# Altium PCB main.PcbDoc
Units mil, origin at the board's own origin, x right, y up, seen from the top; angles counter-clockwise.
Board outline 6000 x 4000 mil, 2 copper layers (Top Layer, Bottom Layer); 62 components, 37 nets, 135 pads, 0 vias.
Unrouted connection lines stored in the file: 98.
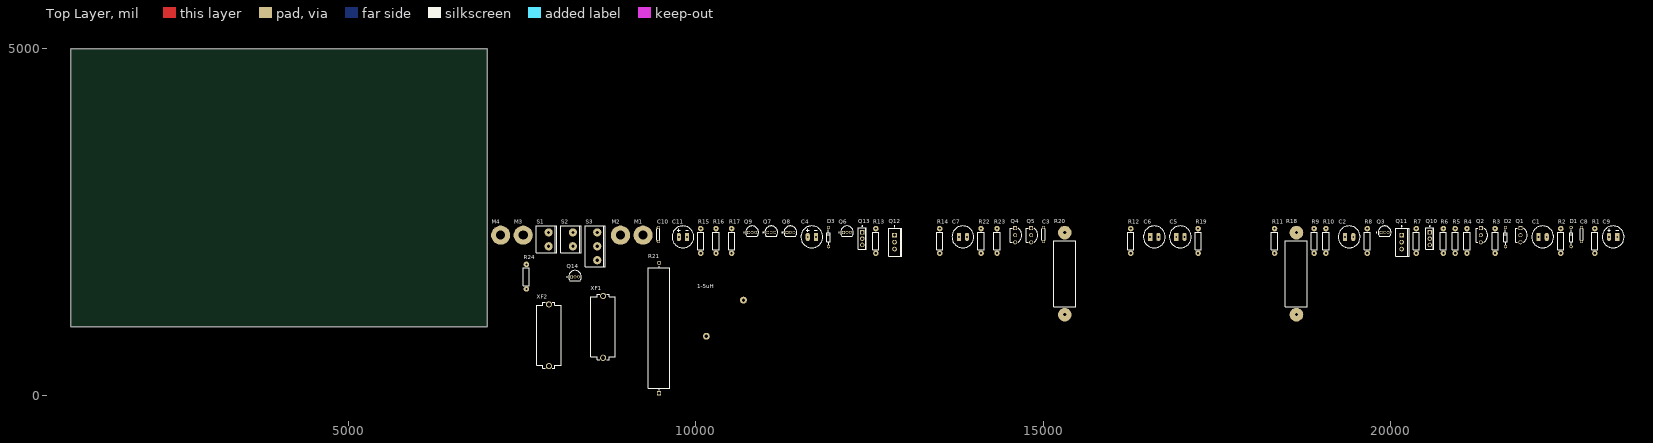
[diagram p0: Top Layer view]
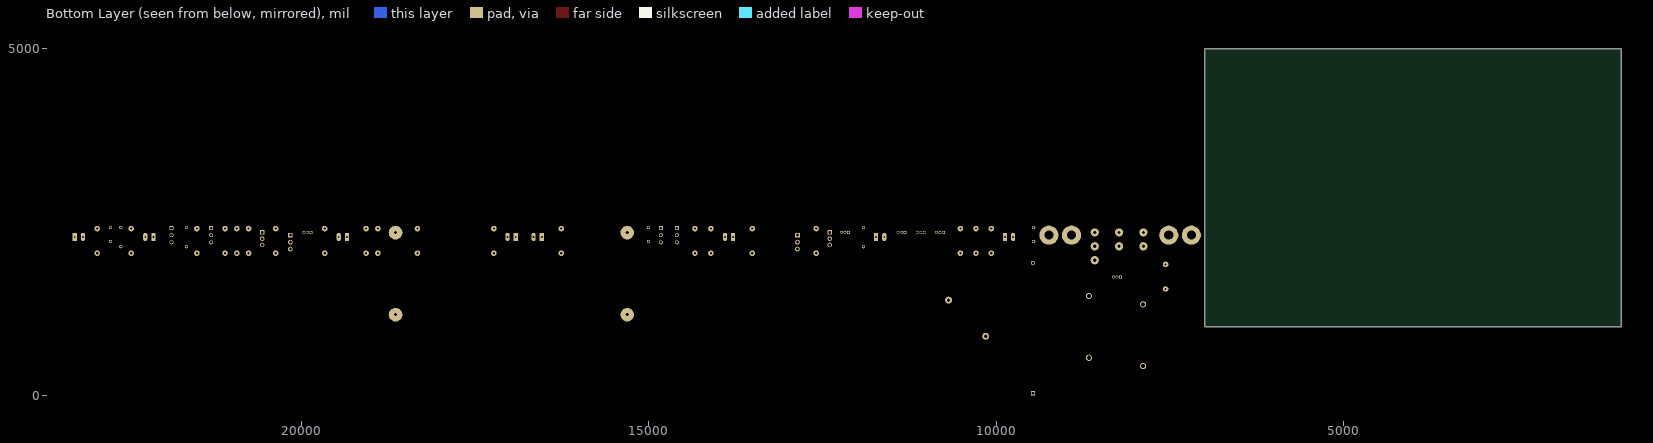
[diagram p1: Bottom Layer view, seen from below]

## Layer stack, top to bottom
Top Solder: solder mask 0.4, Solder Resist, Dk 3.5
Top Layer: signal copper 1.4
Dielectric 1: dielectric 12.6, FR-4, Dk 4.8
Bottom Layer: signal copper 1.4
Bottom Solder: solder mask 0.4, Solder Resist, Dk 3.5

## Board outline
1000,1000 7000,1000 7000,5000 1000,5000

## Design rules (kind name [scope] priority, off if disabled: settings)
Clearance [All] p1: gap=10 ignorepadtopadclearanceinfootprint=FALSE
PolygonConnect [All] p1: connectstyle=Relief reliefconductorwidth=10 reliefentries=4 polygonreliefangle="90 Angle" airgapwidth=10
RoutingVias [All] p1: holewidth=28 width=50 viastyle="Through Hole" minholewidth=28 minwidth=50 maxholewidth=28 maxwidth=50
SolderMaskExpansion [All] p1: expansion=4 istentingtop=FALSE
Width [All] p1: maxlimit=10 minlimit=10 preferedwidth=10
30 further rules are at their usual default settings.

## Components (designator, comment, footprint, x,y, rotation, side; value= is the part's Value field where it differs from the comment)
1-5uH "homemade inductor" "homecooked inductor" 10420,1120 r0 top
C1 "Cap" "Cap Ø8" 22130,2290 r0 top value=47uF
C2 "Cap" "Cap Ø8" 19345,2290 r0 top value=47u
C3 "Cap" Cap-1 15005,2225 r90 top value=100p
C4 "Cap" "Cap Lyt Ø8" 11610,2290 r0 top value=220u
C5 "Cap" "Cap Ø8" 16915,2290 r0 top value=1u
C6 "Cap" "Cap Ø8" 16540,2290 r0 top value=10u
C7 "Cap" "Cap Ø8" 13785,2290 r0 top value=100n
C8 "Cap" Cap-1 22750,2225 r90 top value=100n
C9 "Cap" "Cap Lyt Ø8" 23145,2290 r0 top value=220u
C10 "Cap" Cap-1 9460,2225 r90 top value=100n
C11 "Cap" "Cap Lyt Ø8" 9755,2290 r0 top value=220u
D1 "Diode DO-35" "Diode 2 space" 22600,2150 r90 top
D2 "Diode DO-35" "Diode 2 space" 21655,2150 r90 top
D3 "Diode DO-35" "Diode 2 space" 11910,2150 r90 top
M1 "Screw Hole" "M3 Hole" 9240,2315 r0 top
M2 "Screw Hole" "M3 Hole" 8915,2315 r0 top
M3 "Screw Hole" "M3 Hole" 7515,2315 r0 top
M4 "Screw Hole" "M3 Hole" 7190,2315 r0 top
Q1 "BC557BTF" FP-135AR-MFG 21885,2315 r0 top
Q2 "BC557BTF" FP-135AR-MFG 21315,2315 r0 top
Q3 "BC547B" ONSC-TO-92-3-29-11 19915,2355 r0 top
Q4 "BC557BTF" FP-135AR-MFG 14610,2315 r0 top
Q5 "BC557BTF" FP-135AR-MFG 14840,2315 r0 top
Q6 "BC547B" ONSC-TO-92-3-29-11 12175,2355 r0 top
Q7 "BC547B" ONSC-TO-92-3-29-11 11085,2355 r0 top
Q8 "BC547B" ONSC-TO-92-3-29-11 11360,2355 r0 top
Q9 "BC547B" ONSC-TO-92-3-29-11 10810,2355 r0 top
Q10 "MJE340" ONSC-TO-225-3-77-09 20565,2265 r0 top
Q11 "TIP41C" ONSC-TO-220-3-221A-09 20160,2215 r0 top
Q12 "TIP42C" ONSC-TO-220-3-221A-09 12860,2215 r0 top
Q13 "MJE350" ONSC-TO-225-3-77-09 12395,2265 r0 top
Q14 "BC547B" ONSC-TO-92-3-29-11 8260,1715 r0 top
R1 "Resistor" "RES THT 9mm" 22940,2055 r90 top value=100
R2 "Resistor" "RES THT 9mm" 22450,2055 r90 top value=150
R3 "Resistor" "RES THT 9mm" 21505,2055 r90 top value=2k2
R4 "Resistor" "RES THT 9mm" 21100,2055 r90 top value=16
R5 "Resistor" "RES THT 9mm" 20930,2055 r90 top value=10k
R6 "Resistor" "RES THT 9mm" 20760,2055 r90 top value=100
R7 "Resistor" "RES THT 9mm" 20370,2055 r90 top value=1k
R8 "Resistor" "RES THT 9mm" 19665,2055 r90 top value=10k
R9 "Resistor" "RES THT 9mm" 18900,2055 r90 top value=100
R10 "Resistor" "RES THT 9mm" 19070,2055 r90 top value=100
R11 "Resistor" "RES THT 9mm" 18330,2055 r90 top value=280
R12 "Resistor" "RES THT 9mm" 16260,2055 r90 top value=10K
R13 "Resistor" "RES THT 9mm" 12590,2055 r90 top value=100
R14 "Resistor" "RES THT 9mm" 13510,2055 r90 top value=500
R15 "Resistor" "RES THT 9mm" 10070,2055 r90 top value=68
R16 "Resistor" "RES THT 9mm" 10290,2055 r90 top value=68
R17 "Resistor" "RES THT 9mm" 10515,2055 r90 top value=68
R18 "Resistor" "RES THT 30mm" 18645,1170 r90 top value=0.4
R19 "Resistor" "RES THT 9mm" 17230,2055 r90 top value=220
R20 "Resistor" "RES THT 30mm" 15310,1170 r90 top value=0.4
R21 "AC10000004708JAB00" FP-AC10-MFG 9470,976.57 r90 top
R22 "Resistor" "RES THT 9mm" 14105,2055 r90 top value=22.6k
R23 "Resistor" "RES THT 9mm" 14335,2055 r90 top value=10
R24 "Resistor" "RES THT 9mm" 7560,1540 r90 top value=18.7k
S1 "Screw 2" Screw-2 7880,2155 r90 top
S2 "Screw 2" Screw-2 8230,2155 r90 top
S3 "Screw 3" Screw-3 8580,1955 r90 top
XF1 "696101000002" 696101000002 -41335,50994.88 r90 top
XF2 "696101000002" 696101000002 -42115,50874.88 r90 top

## Footprints (in the part's own frame and the unit in brackets; to place one, negate y for a bottom-side part, rotate by r counter-clockwise, add the part's x,y. Pads: shape width x height; smd on the part's side, far side on the other; paste and mask are expansions set on the pad)
696101000002 [mm] "FUSEHOLDER BLOCKS - PCB - CLIP COVER - THT"
  round 2.25 hole 1.5: 1(-1281.3,-1270) 2(-1258.7,-1270)
  silkscreen extent -1282,-1274.5 -1258,-1265.5, body extent -1282,-1274.5 -1258,-1265.5, height 13.55
"Cap Lyt Ø8" [mm] "Capacitor"
  oval 1.5x3 hole 0.7: 1(0,0)
  rect 1.5x3 hole 0.7: 2(3,0)
  silkscreen extent -2.5,-4 5.5,4
"Cap Ø8" [mm] "Capacitor"
  rect 1.5x3 hole 0.7: 1(0,0)
  oval 1.5x3 hole 0.7: 2(3,0)
  silkscreen extent -2.5,-4 5.5,4
Cap-1 [mm] "Capacitor with 1 space"
  round 1.2 hole 0.7: 1(0,0) 2(5.08,0)
  silkscreen extent 0.45,-0.58 4.62,0.58
"Diode 2 space" [mm] "Diode 2 emty spaces"
  round 1.2 hole 0.7: 1(0,0) 2(7,0)
  silkscreen extent 0.77,-0.6 6.22,0.6, body extent -0.23,-0.77 7.22,0.75, height 1.51
FP-135AR-MFG [mm]
  rect 1.45x1.45 hole 0.95 paste-2539.97 mask+0: 1(-0.38,2.6)
  round 1.45 hole 0.95 paste-2539.97 mask+0: 2(-0.38,0) 3(-0.38,-2.6)
  silkscreen extent -2.09,-2.6 2.09,2.6, body extent -2.19,-3.42 2.19,3.42, height 0.25
FP-AC10-MFG [mm]
  rect 1.55x1.55 hole 1 paste-2539.97 mask+0: 1(-23.83,0)
  round 1.55 hole 1 paste-2539.97 mask+0: 2(23.83,0)
  silkscreen extent -22.65,-4 22.65,4, body extent -24.71,-4.1 24.71,4.1, height 0.25
"homecooked inductor" [mil]
  round 100 hole 47.24: 1(265,260) 2(-270,-260)
  body extent -409,-465 418,401, height 625
"M3 Hole" [mm]
  round 7 hole 3.3 mask+0: 1(0,0)
ONSC-TO-92-3-29-11 [mm] "TO, 3-Leads, Body Dia 4.7mm, Pitch 1.27mm"
  rect 1.05x1.05 hole 0.8: 1(-1.27,0)
  round 1.05 hole 0.8: 2(0,0) 3(1.27,0)
  silkscreen extent -3.07,-1.34 2.35,2.35, body extent -2.35,-1.33 2.36,2.36, height 7.87
ONSC-TO-220-3-221A-09 [mm] "FM, 3-Leads, Body 10.3x4.85mm, Pitch 2.54mm"
  rect 1.7x1.7 hole 1.1: 1(0,2.54)
  round 1.7 hole 1.1: 2(0,0) 3(0,-2.54)
  silkscreen extent -2.2,-5.15 2.7,5.92, body extent -2.18,-5.15 2.67,5.15, height 19.85
ONSC-TO-225-3-77-09 [mm] "FM, 3-Leads, Body 7.8x3mm, Pitch 2.29mm"
  rect 1.6x1.6 hole 1: 1(0,2.29)
  round 1.6 hole 1: 2(0,0) 3(0,-2.29)
  silkscreen extent -1.49,-3.9 1.51,4.67, body extent -1.49,-3.9 1.51,3.9, height 13.64
"RES THT 9mm" [mm]
  round 2 hole 0.8: 1(0,0) 2(9,0)
  silkscreen extent 1.28,-1.12 7.73,1.12, body extent -0.32,-1.13 9.28,1.14, height 2.36
"RES THT 30mm" [mm] "Typically power resistor"
  round 5 hole 1.1: 1(0,0) 2(30,0)
  silkscreen extent 3,-4 27,4
Screw-2 [mm] "Screw Terminal with 2 connections"
  round 3 hole 1.2: 1(0,0) 2(5.075,0)
  silkscreen extent -2.37,-3.03 7.45,4.43, body extent -3.07,-3.1 7.53,4.5, height 10
Screw-3 [mm] "Screw Terminal with 3 connections"
  round 3 hole 1.2: 1(0,0) 2(5.075,0) 3(10.15,0)
  silkscreen extent -2.37,-3.03 12.52,4.43, body extent -2.95,-3.8 12.55,4, height 10.3

## Part data
C1 C2 C5 C6 C7: library part "Capacitor unpolarized"
C3 C8 C10: library part "Capacitor 1 space"
C4 C9 C11: library part "Capacitor electrolytic"
Q1 Q2 Q4 Q5: library part CMP-00278-84408945-1, "BC557BTF Small Signal Bipolar Transistor, 0.1A I(C), 45V V(BR)CEO, 1-Element, PNP, Silicon, TO-92", Case/Package=TO-92, Collector Base Voltage (VCBO)=-50V, Collector Emitter Breakdown Voltage=45V, Collector Emitter Saturation Voltage=-250mV, Current Rating=-100mA, Emitter Base Voltage (VEBO)=-5V, Frequency=150MHz, Manufacturer Lifecycle Status=ACTIVE, Max Collector Current=100mA, Max Frequency=10MHz, Max Operating Temperature=150°C, Max Power Dissipation=500mW, Min Operating Temperature=-65°C, Voltage Rating (DC)=-45V, Collector Emitter Voltage (VCEO)=45V, Contact Plating=Tin, Element Configuration=Single, Gain Bandwidth Product=150MHz, Height=5.33mm, hFE Min=110, Lead Free="Lead Free", Length=5.2mm, Lifecycle Status=Production, Max Breakdown Voltage=45V, Mount="Through Hole", NexarPartId=84408945, Number of Elements=1, Number of Pins=3, Polarity=PNP, Power Dissipation=500mW, REACH SVHC="No SVHC", RoHS=Compliant, Schedule B="8541210080, 8541210080", Transition Frequency=150MHz, Weight=240mg, Width=4.19mm
Q3 Q6 Q7 Q8 Q9 Q14: library part CMP-1048-01467-1, "Amplifier Transistor, NPN Silicon, 3-Pin TO-92, Bulk Box", Manufacturer="On Semiconductor", ComponentLink1Description="Manufacturer URL", ComponentLink1URL=http://www.onsemi.com/, ComponentLink2Description=Datasheet, ComponentLink2URL=http://www.onsemi.com/pub_link/Collateral/BC546-D.PDF, ComponentLink3Description="Package Specification", ComponentLink3URL=http://www.onsemi.cn/pub_link/Collateral/2N6426-D.PDF, DatasheetVersion="Rev. 7", fT Min (MHz)=150, IC Continuous (A)=0.1, Mounting Technology="Through Hole", PackageDescription="3-Pin Transistor Outline, Body 4.825 x 3.685 mm, Pitch 1.27 mm", PackageReference=TO-92-3-29-11_AM_SL, PackageVersion="Rev. AM", Packing="Bulk Box", PartNumber=BC547B, Polarity=NPN, RoHS=FALSE
Q10: library part CMP-1048-01251-1, "Plastic Medium-Power NPN Silicon Transistor, 3-Pin TO-225, Bulk Box", Manufacturer="On Semiconductor", ComponentLink1Description="Manufacturer URL", ComponentLink1URL=http://www.onsemi.com/, ComponentLink2Description=Datasheet, ComponentLink2URL=http://www.onsemi.com/pub_link/Collateral/MJE340-D.PDF, ComponentLink3Description="Package Specification", ComponentLink3URL=http://www.onsemi.com/pub_link/Collateral/77-09.PDF, DatasheetVersion="Rev. 12", IC Continuous (A)=0.5, Mounting Technology="Through Hole", Note1=0, PackageDescription="3-Pin Flange Mount, Vertical Straight Lead, Body 7.6 x 2.7 mm, Pitch 2.29 mm", PackageReference=TO-225-3-77-09, PackageVersion="Rev. AC, 12/2013", Packing="Bulk Box", PartNumber=MJE340, Polarity=NPN, RoHS=FALSE
Q11: library part CMP-1048-01171-1, "Complementary Silicon Plastic Power Transistor, 3-Pin TO-220, Tube", Manufacturer="On Semiconductor", ComponentLink1Description="Manufacturer URL", ComponentLink1URL=http://www.onsemi.com/, ComponentLink2Description=Datasheet, ComponentLink2URL=http://www.onsemi.com/pub_link/Collateral/TIP41A-D.PDF, ComponentLink3Description="Package Specification", ComponentLink3URL=http://www.onsemi.com/pub_link/Collateral/221A-09.PDF, DatasheetVersion="Rev. 10", fT Min (MHz)=3, IC Continuous (A)=6, Mounting Technology="Through Hole", PackageDescription="3-Pin Flange Mount, Vertical Straight Lead, Body 9.97 x 4.445 mm, Pitch 2.54 mm", PackageReference=TO-220-3-221A-09, PackageVersion="Rev. AG, 09/2011", Packing=Tube, PartNumber=TIP41C, Polarity=NPN, RoHS=FALSE
Q12: library part CMP-1048-01107-1, "Complementary Silicon Plastic Power Transistor, 3-Pin TO-220, Tube", Manufacturer="On Semiconductor", ComponentLink1Description="Manufacturer URL", ComponentLink1URL=http://www.onsemi.com/, ComponentLink2Description=Datasheet, ComponentLink2URL=http://www.onsemi.com/pub_link/Collateral/TIP41A-D.PDF, ComponentLink3Description="Package Specification", ComponentLink3URL=http://www.onsemi.com/pub_link/Collateral/221A-09.PDF, DatasheetVersion="Rev. 10", fT Min (MHz)=3, IC Continuous (A)=6, Mounting Technology="Through Hole", PackageDescription="3-Pin Flange Mount, Vertical Straight Lead, Body 9.97 x 4.445 mm, Pitch 2.54 mm", PackageReference=TO-220-3-221A-09, PackageVersion="Rev. AG, 09/2011", Packing=Tube, PartNumber=TIP42C, Polarity=PNP, RoHS=FALSE
Q13: library part CMP-1048-01257-1, "Plastic Medium-Power PNP Silicon Transistor, 3-Pin TO-225, Bulk Box", Manufacturer="On Semiconductor", ComponentLink1Description="Manufacturer URL", ComponentLink1URL=http://www.onsemi.com/, ComponentLink2Description=Datasheet, ComponentLink2URL=http://www.onsemi.com/pub_link/Collateral/MJE350-D.PDF, ComponentLink3Description="Package Specification", ComponentLink3URL=http://www.onsemi.com/pub_link/Collateral/77-09.PDF, DatasheetVersion="Rev. 16", IC Continuous (A)=0.5, Mounting Technology="Through Hole", Note1=0, PackageDescription="3-Pin Flange Mount, Vertical Straight Lead, Body 7.6 x 2.7 mm, Pitch 2.29 mm", PackageReference=TO-225-3-77-09, PackageVersion="Rev. AC, 12/2013", Packing="Bulk Box", PartNumber=MJE350, Polarity=PNP, RoHS=FALSE
R21: library part CMP-00030-44829031-1, "AC10000004708JAB00 Resistor, 4.7 Ohm, ± 5%, 10 W, Axial Leaded, Wirewound, General Purpose", Case/Package=Axial, Max Operating Temperature=200°C, Max Power Dissipation=10W, Min Operating Temperature=-40°C, Resistance=4.7Ω, Temperature Coefficient=-80ppm/°C, Tolerance=5%, Composition=Wirewound, Contact Plating=Tin, Diameter=8mm, Features="Flame Retardant Coating", Length=44mm, Military Standard=Not, Mount="Through Hole", NexarPartId=44829031, Number of Terminations=2, Packaging="Tape & Box (TB)", Power Rating=10W, Radiation Hardening=No, RoHS=Compliant, Termination=Axial, Thickness=8mm, Width=8mm
XF1 XF2: library part CMP-1502-00233-3, Fuse Current=10A, Max Operating Temperature=120°C, Min Operating Temperature=-30°C, Voltage Rating (AC)=250V, Height=13.6mm, Mount="Through Hole", NexarPartId=56808803, Packaging=Box, REACH SVHC=Unknown, RoHS=Non-Compliant
D1 D2 D3: Model=1N4148

## Nets (pads, with @x,y where several pads share a name; then routed paths per layer and width w, separated by ;. In a path a pad name is that pad's centre, name@x,y a point inside that pad or via, vN(x,y) a via of type N, cw(c..) or ccw(c..) an arc to the next point about the centre after c; other vN are vias at no path point)
+37V: C1.2 C8.2 C9.1 D1.1 Q10.2 Q11.2 Q14.1 R1.2 R2.2 XF1.2
-37V: C10.2 C11.1 Q9.3 Q12.2 Q13.2 R15.1 R16.1 R17.1 R24.2 XF2.2
GND: C4.2 C7.1 C8.1 C9.2 C10.1 C11.2 D3.1 M1.1 M2.1 M3.1 M4.1 Q6.1 R8.2 R22.2 S1.2 S2.2 S3.2
Input: Q14.2 S1.1
InVAS: C3.1 Q4.1 Q6.2 Q7.1
NetC1_1: C1.1 R5.2 R8.1
NetC2_1: C2.1 C3.2 Q3.3 Q9.1 R11.1 R13.2
NetC2_2: C2.2 Q1.1 R4.2 R7.2
NetC4_1: C4.1 D3.2 R14.1
NetC5_1: C5.1 Q12.1 Q13.1 R19.1
NetC5_2: C5.2 Q10.1 Q11.1 R19.2
NetC6_1: C6.1 Q4.2 R22.1
NetC6_2: C6.2 Q14.3 R24.1
NetC7_2: C7.2 R21.1
NetD1_2: D1.2 D2.1
NetD2_2: D2.2 Q1.2 R3.1 R5.1
NetQ1_3: Q1.3 R1.1
NetQ2_1: Q2.1 R9.2 R10.2
NetQ2_2: Q2.2 R3.2
NetQ2_3: Q2.3 R2.1
NetQ3_1: Q3.1 R4.1 R6.2
NetQ3_2: Q3.2 R7.1 R11.2
NetQ4_3: Q4.3 R9.1
NetQ5_1: Q5.1 Q7.2 Q8.1 Q8.2
NetQ5_2: Q5.2 R12.2 R14.2
NetQ5_3: Q5.3 R10.1
NetQ6_3: Q6.3 Q9.2 R17.2
NetQ7_3: Q7.3 R15.2
NetQ8_3: Q8.3 R16.2
NetQ10_3: Q10.3 R6.1
NetQ11_3: Q11.3 R18.2
NetQ12_3: Q12.3 R20.1
NetQ13_3: Q13.3 R13.1
NetS3_1: S3.1 XF1.1
NetS3_3: S3.3 XF2.1
NFB: 1-5uH.1 R12.1 R18.1 R20.2 R21.2 R23.2
Output: 1-5uH.2 R23.1 S2.1